# Altium PCB EE209_PCB.PcbDoc
Units mm, origin at the board's own origin, x right, y up, seen from the top; angles counter-clockwise.
Board outline 54 x 85.8 mm, 2 copper layers (Top Layer, Bottom Layer); 74 components, 41 nets, 229 pads, 29 vias.
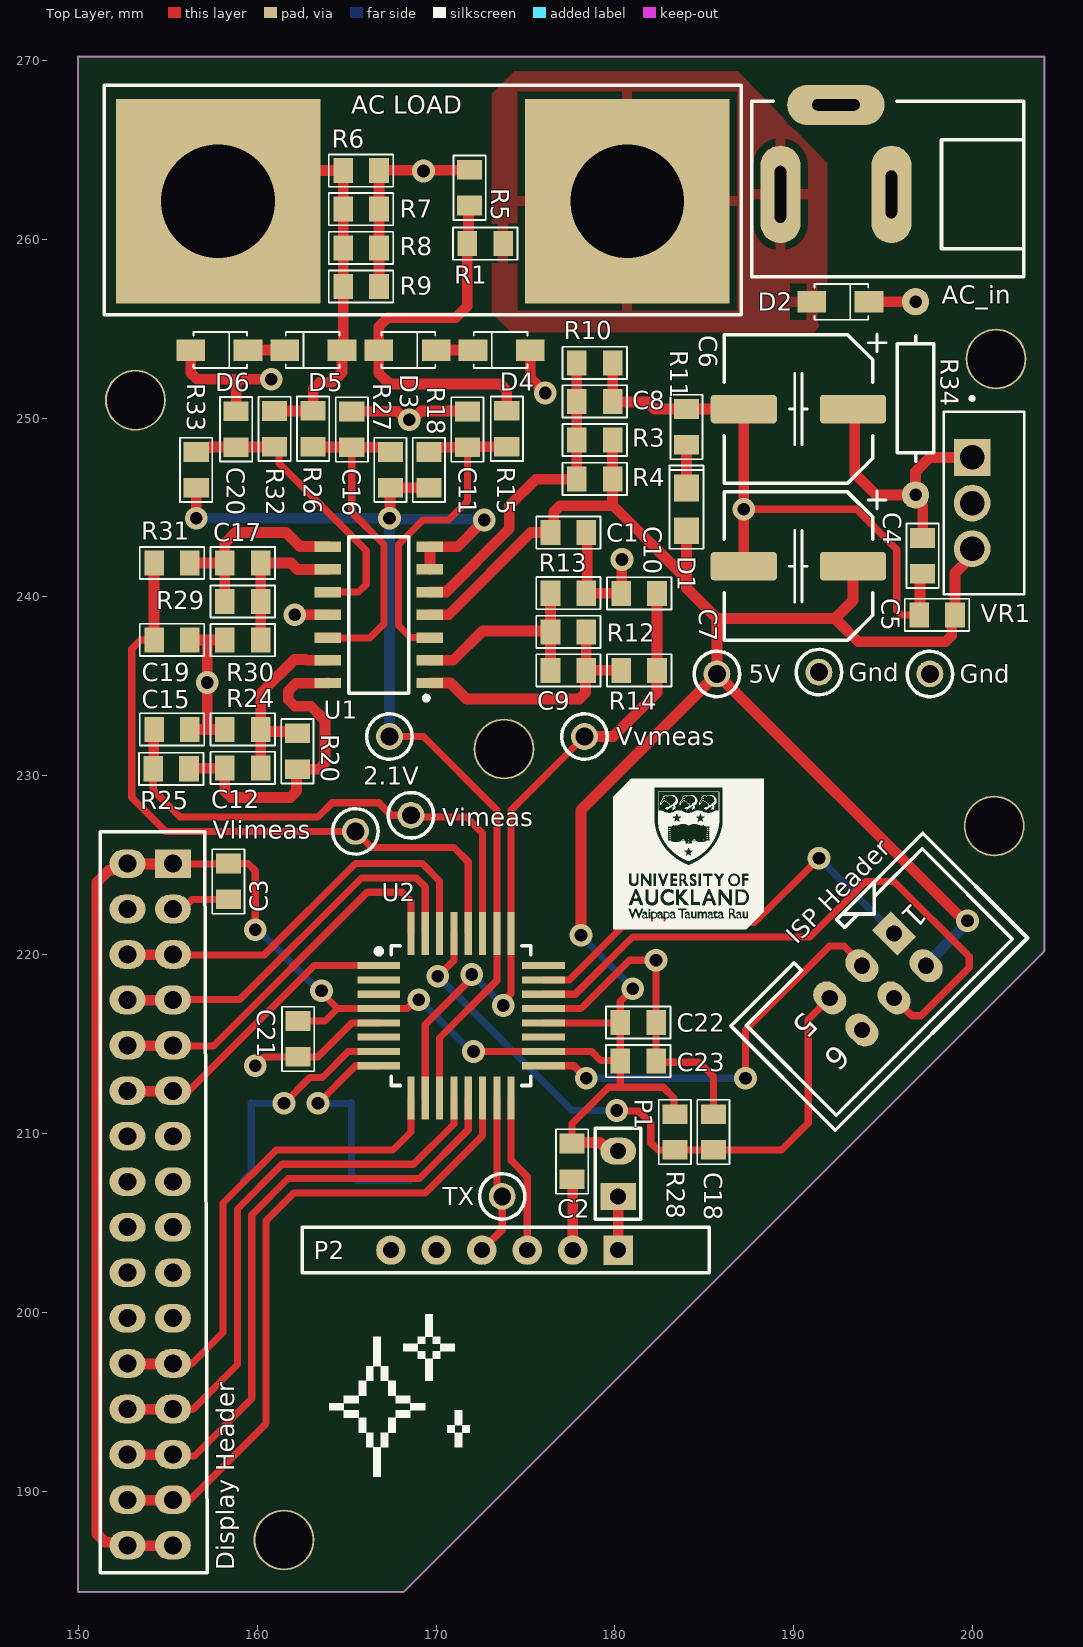
[diagram p0: Top Layer view]
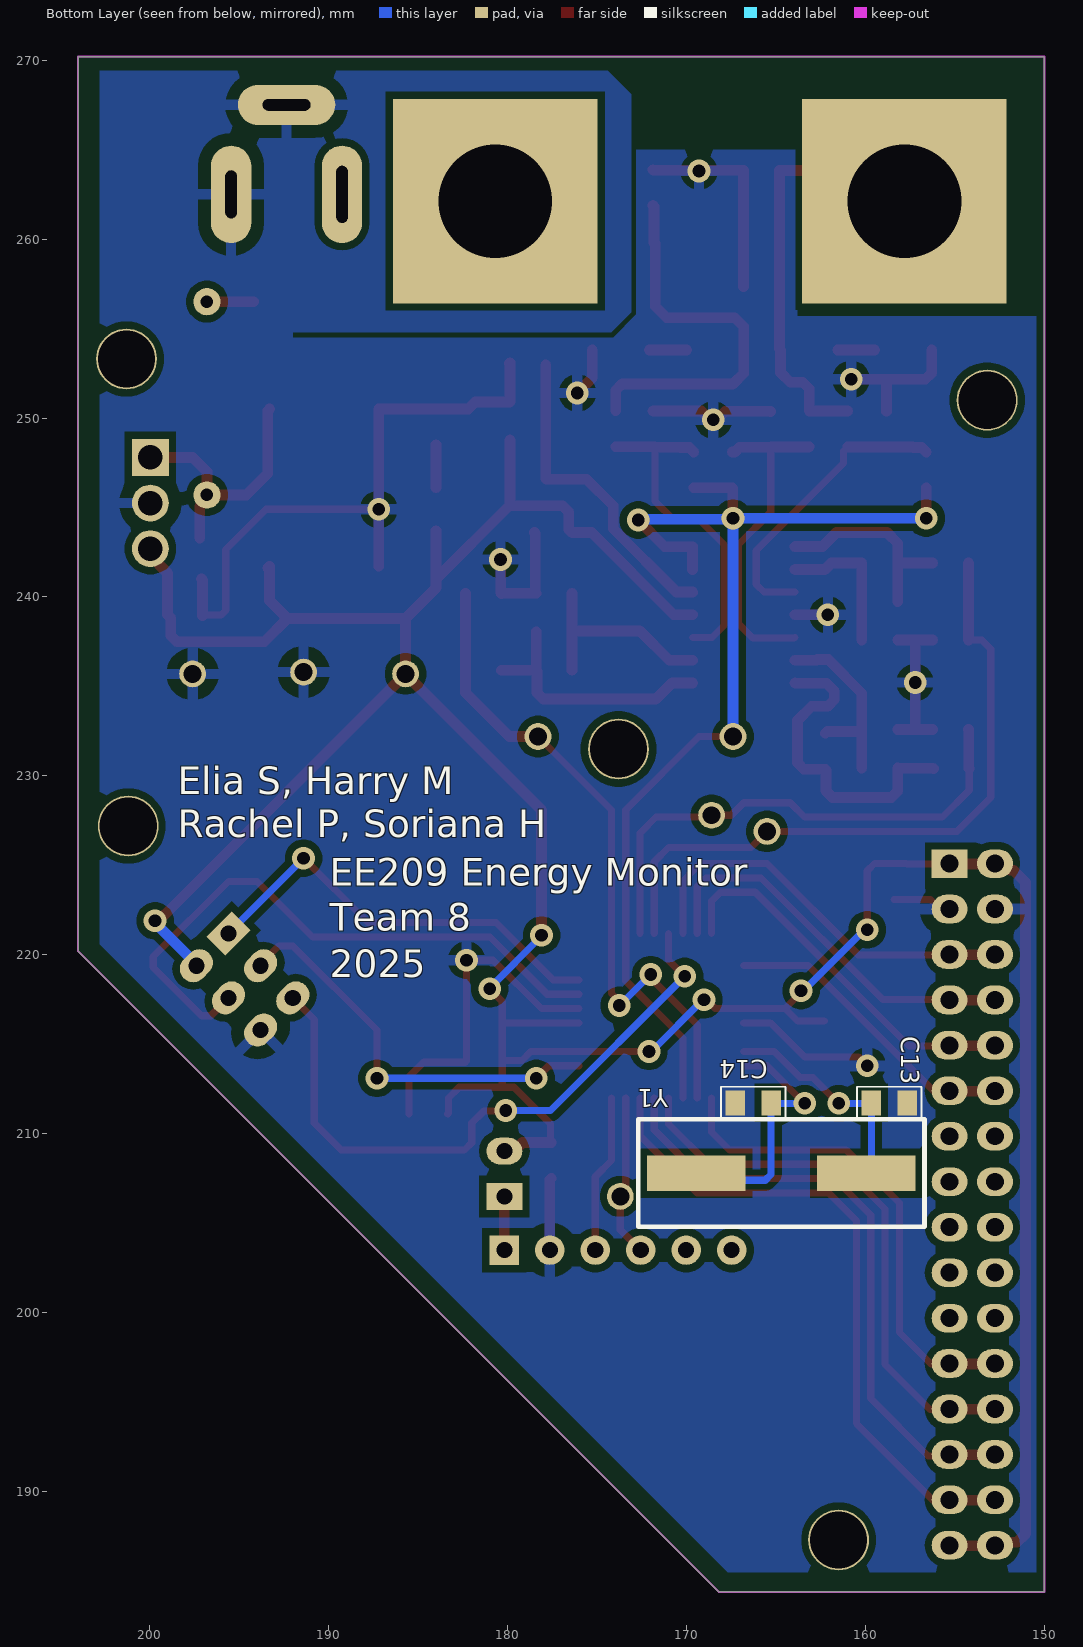
[diagram p1: Bottom Layer view, seen from below]

## Layer stack, top to bottom
Top Solder: solder mask 0.0102, Solder Resist, Dk 3.5
Top Layer: signal copper 0.0356
Dielectric 1: dielectric 0.32, FR-4, Dk 4.8
Bottom Layer: signal copper 0.0356
Bottom Solder: solder mask 0.0102, Solder Resist, Dk 3.5

## Board outline
150,184.4 150,270.2 204,270.2 204,220.2 168.2,184.4

## Design rules (kind name [scope] priority, off if disabled: settings)
Clearance [All] p1: gap=0.4 ignorepadtopadclearanceinfootprint=FALSE
Height [All] p1: minheight=0 maxheight=20 prefheight=12.7
HoleSize [All] p1: absolutevalues=TRUE maxlimit=10 minlimit=0.4 maxpercent=80.000 minpercent=20.000
MinimumSolderMaskSliver [All] p1: minsoldermaskwidth=0.1
PolygonConnect [All] p1: thpad.connectstyle=Relief thpad.reliefconductorwidth=0.6 thpad.reliefentries=4 thpad.polygonreliefangle="90 Angle" thpad.airgapwidth=0.7 smdpad.connectstyle=Direct smdpad.reliefconductorwidth=0.6 smdpad.reliefentries=4 smdpad.polygonreliefangle="90 Angle" smdpad.airgapwidth=0.4 via.connectstyle=Relief via.reliefconductorwidth=0.6 via.reliefentries=4 via.polygonreliefangle="90 Angle" via.airgapwidth=0.4
RoutingVias [All] p1: holewidth=0.711 width=1.27 viastyle="Through Hole" minholewidth=0.711 minwidth=1.27 maxholewidth=0.711 maxwidth=1.27
SilkToSilkClearance [All] p1: silktosilkclearance=0.1
SilkToSolderMaskClearance [IsPad] p1: minsilkscreentomaskgap=0.1 clearancetoexposedcopper=TRUE
SolderMaskExpansion [All] p1: expansion=0.102 istentingtop=FALSE
SupplyNets "Schematic Supply Nets_26" [InNet('+2.1')] p1: voltage=0.000
SupplyNets "Schematic Supply Nets_25" [InNet('DS3')] p2: voltage=0.000
SupplyNets "Schematic Supply Nets_24" [InNet('RX')] p3: voltage=0.000
SupplyNets "Schematic Supply Nets_23" [InNet('+5')] p4: voltage=0.000
SupplyNets "Schematic Supply Nets_22" [InNet('TX')] p5: voltage=0.000
SupplyNets "Schematic Supply Nets_21" [InNet('SCK')] p6: voltage=0.000
SupplyNets "Schematic Supply Nets_20" [InNet('Visp')] p7: voltage=0.000
SupplyNets "Schematic Supply Nets_19" [InNet('SH_DS')] p8: voltage=0.000
SupplyNets "Schematic Supply Nets_18" [InNet('GND')] p9: voltage=0.000
SupplyNets "Schematic Supply Nets_17" [InNet('MOSI')] p10: voltage=0.000
SupplyNets "Schematic Supply Nets_16" [InNet('Vvsp')] p11: voltage=0.000
SupplyNets "Schematic Supply Nets_15" [InNet('RST')] p12: voltage=0.000
SupplyNets "Schematic Supply Nets_14" [InNet('Vac')] p13: voltage=0.000
SupplyNets "Schematic Supply Nets_13" [InNet('En')] p14: voltage=0.000
SupplyNets "Schematic Supply Nets_12" [InNet('DS2')] p15: voltage=0.000
SupplyNets "Schematic Supply Nets_11" [InNet('SH_ST')] p16: voltage=0.000
SupplyNets "Schematic Supply Nets_10" [InNet('DS1')] p17: voltage=0.000
SupplyNets "Schematic Supply Nets_8" [InNet('DS4')] p18: voltage=0.000
SupplyNets "Schematic Supply Nets_7" [InNet('X1')] p19: voltage=0.000
SupplyNets "Schematic Supply Nets_5" [InNet('Vlimeas')] p20: voltage=0.000
SupplyNets "Schematic Supply Nets_4" [InNet('X2')] p21: voltage=0.000
SupplyNets "Schematic Supply Nets_3" [InNet('Vvmeas')] p22: voltage=0.000
SupplyNets "Schematic Supply Nets_2" [InNet('Vimeas')] p23: voltage=0.000
SupplyNets "Schematic Supply Nets_1" [InNet('MISO')] p24: voltage=0.000
SupplyNets "Schematic Supply Nets" [InNet('SH_CP')] p25: voltage=0.000
Width [All] p1: maxlimit=10 minlimit=0.4 preferedwidth=0.6
25 further rules are at their usual default settings.

## Components (designator, comment, footprint, x,y, rotation, side; value= is the part's Value field where it differs from the comment)
2.1V "5003" TP_TH 167.4,232.2 r0 top
5V "5003" TP_TH 185.7,235.7 r0 top
"AC LOAD" "AC Load" "Dual Banana Plug" 169.25,262.125 r180 top
AC_in "DC barrel jack" AC-Socket 195.25,262.5 r180 top value=socket
C1 "100nF" "0805 CAP" 177.4,243.6 r0 top
C2 "100nF" "0805 CAP" 177.605,208.453 r270 top
C3 "100nF" "0805 CAP" 158.4,224.1 r270 top
C4 "330nF" "0805 CAP" 197.2,242.3 r270 top
C5 "100nF" "0805 CAP" 198,239 r180 top
C6 "10uF" "CAP POL 8x5.4mm SMT" 190.25,250.5 r180 top
C7 "10uF" "CAP POL 8x5.4mm SMT" 190.25,241.72 r180 top
C8 "10nF" "0805 CAP" 178.87,250.928 r0 top
C9 "180pF" "0805 CAP" 177.4,235.9 r0 top
C10 "15nF" "0805 CAP" 181.354,240.2 r0 top
C11 "180pF" "0805 CAP" 171.754,249.36 r90 top
C12 "33pF" "0805 CAP" 159.2,230.446 r180 top
C13 "18pF" "0805 CAP" 158.671,211.731 r180 bottom
C14 "18pF" "0805 CAP" 166.273,211.731 r0 bottom
C15 "15nF" "0805 CAP" 155.246,232.599 r180 top
C16 "33pF" "0805 CAP" 165.292,249.36 r90 top
C17 "68pF" "0805 CAP" 159.2,241.9 r180 top
C18 "1.5nF" "0805 CAP" 185.5,210.1 r90 top
C19 "15nF" "0805 CAP" 155.246,237.6 r180 top
C20 "68pF" "0805 CAP" 158.83,249.375 r90 top
C21 "100nF" "0805 CAP" 162.3,215.3 r270 top
C22 "100nF" "0805 CAP" 181.301,216.218 r0 top
C23 "100nF" "0805 CAP" 181.3,214.064 r0 top
D1 "LTST-C170KGKT" "0805 LED" 183.994,244.898 r90 top
D2 "1N4148W-7-F" SOD123 192.651,256.496 r0 top
D3 "BZT52H-B4V7" SOD123 168.457,253.8 r0 top
D4 "BZT52H-B4V7" SOD123 173.614,253.8 r180 top
D5 "BZT52H-B4V7" SOD123 163.1,253.8 r180 top
D6 "BZT52H-B4V7" SOD123 157.943,253.8 r0 top
"Display Header" "Display" Display 154.03,207.32 r90 top
Gnd "5003" TP_TH 197.6,235.7 r0 top (schematic designator TP2)
Gnd "5003" TP_TH 191.4,235.8 r0 top (schematic designator TP1)
"ISP Header" "Header 3X2" ECE-BHDR2X3 195.596,221.188 r225 top (schematic designator "ISp Header")
P1 "Header 2" ece-HDR1X2 180.179,206.494 r90 top
P2 "BLE Module Header" HM10_HDR1X6 180.18,203.5 r180 top
R1 "560k" "0805 RES" 172.75,259.75 r0 top
R3 "3.3k" "0805 RES" 178.87,248.774 r0 top
R4 "5.6k" "0805 RES" 178.87,246.601 r0 top
R5 "27k" "0805 RES" 171.875,262.875 r270 top
R6 "1" "0805 RES" 165.809,263.83 r180 top
R7 "1" "0805 RES" 165.809,261.671 r180 top
R8 "1" "0805 RES" 165.809,259.512 r180 top
R9 "1" "0805 RES" 165.809,257.353 r180 top
R10 "1.5k" "0805 RES" 178.87,253.082 r180 top
R11 "220" "0805 RES" 184,249.502 r270 top
R12 "82k" "0805 RES" 177.4,238.054 r180 top
R13 "82k" "0805 RES" 177.4,240.208 r180 top
R14 "1k" "0805 RES" 181.354,235.902 r180 top
R15 "56k" "0805 RES" 173.954,249.4 r270 top
R18 "82k" "0805 RES" 169.6,247.1 r270 top
R20 "530k" "0805 RES" 162.254,231.377 r90 top
R24 "100k" "0805 RES" 159.2,232.6 r0 top
R25 "1k" "0805 RES" 155.2,230.4 r0 top
R26 "100k" "0805 RES" 163.138,249.4 r270 top
R27 "530k" "0805 RES" 167.446,247.1 r270 top
R28 "10k" "0805 RES" 183.346,210.1 r90 top
R29 "230k" "0805 RES" 159.2,239.746 r0 top
R30 "12k" "0805 RES" 159.2,237.592 r0 top
R31 "1k" "0805 RES" 155.246,241.9 r0 top
R32 "12k" "0805 RES" 160.984,249.391 r270 top
R33 "230k" "0805 RES" 156.6,247.1 r270 top
R34 "*" AXIAL-0.4 196.8,251.1 r270 top
TX "5003" TP_TH 173.7,206.5 r0 top
U1 "LM324DR2G" SOIC-14 166.8,239 r180 top
U2 "ATmega328PB MCU" "32 - TQFP" 171.4,216.6 r0 top
Vimeas "5003" TP_TH 168.6,227.8 r0 top
Vlimeas "5003" TP_TH 165.5,226.9 r0 top
VR1 "L7805" TO255P1020X450X2000-3 200.625,245.25 r270 top
Vvmeas "5003" TP_TH 178.3,232.2 r0 top
Y1 "SMT-XTAL 16MHz" HC49-US 164.7,207.8 r0 bottom

## Footprints (in the part's own frame and the unit in brackets; to place one, negate y for a bottom-side part, rotate by r counter-clockwise, add the part's x,y. Pads: shape width x height; smd on the part's side, far side on the other; paste and mask are expansions set on the pad)
"32 - TQFP" [mm]
  rect 2.4x0.4 smd: 1(-4.6,2.8) 2(-4.6,2) 3(-4.6,1.2) 4(-4.6,0.4) 5(-4.6,-0.4) 6(-4.6,-1.2) 7(-4.6,-2) 8(-4.6,-2.8) 17(4.6,-2.8) 18(4.6,-2) 19(4.6,-1.2) 20(4.6,-0.4) 21(4.6,0.4) 22(4.6,1.2) 23(4.6,2) 24(4.6,2.8)
  rect 0.4x2.4 smd: 9(-2.8,-4.6) 10(-2,-4.6) 11(-1.2,-4.6) 12(-0.4,-4.6) 13(0.4,-4.6) 14(1.2,-4.6) 15(2,-4.6) 16(2.8,-4.6) 25(2.8,4.6) 26(2,4.6) 27(1.2,4.6) 28(0.4,4.6) 29(-0.4,4.6) 30(-1.2,4.6) 31(-2,4.6) 32(-2.8,4.6)
  silkscreen extent -4.74,-3.9 3.9,3.9, body extent -4.5,-4.5 4.5,4.5, height 1.3
"0805 CAP" [mm] "http://www.digikey.co.nz/Web%20Export/Supplier%20Content/Vishay_8026/PDF/VishayBeyschlag_SolderPad.pdf?redirected=1 with dimension G modified by +0.25mm"
  rect 1.1x1.4 smd: 1(-1,0) 2(1,0)
  silkscreen extent -1.8,-0.9 1.8,0.9, body extent -1.04,-0.66 1.04,0.66, height 0.61
"0805 LED" [mm] "RED AS AlGaAs SMD LED, Body; 2mm x 1.25 mm (LxW)"
  rect 1.5x1.4 smd: 1(-1.2,0) 2(1.2,0)
  silkscreen extent -2.2,-0.95 2.45,0.95, body extent -1,-0.63 1,0.63, height 1.1
"0805 RES" [mm] "http://www.digikey.co.nz/Web%20Export/Supplier%20Content/Vishay_8026/PDF/VishayBeyschlag_SolderPad.pdf?redirected=1 with dimension G modified by +0.25mm"
  rect 1.1x1.4 smd: 1(-1,0) 2(1,0)
  silkscreen extent -1.8,-0.9 1.8,0.9, body extent -1.04,-0.66 1.04,0.66, height 0.61
AC-Socket [mm]
  oval 2.25x5.45 hole 0.635 slot 3.175 at 90 deg: 1(6,0)
  oval 5.45x2.25 hole 0.635 slot 2.667 at 0 deg: 2(2.9,-5)
  oval 2.25x5.45 hole 0.635 slot 2.667 at 90 deg: 3(-0.2,0)
  silkscreen extent -7.6,-5.2 7.6,4.6, body extent -6.7,-5 6,4.2, height 10.5
AXIAL-0.4 [mm]
  round 1.524 hole 0.7: 1(-5.4,0) 2(5.4,0)
  silkscreen extent -3.5,-1.02 3.5,1.02, body extent -5.7,-1.3 5.7,1.3, height 2.7
"CAP POL 8x5.4mm SMT" [mm]
  round 0.508 on Mech15: 0(0,0)
  rrect25% 3.7x1.6 smd: 1(-3.05,0) 2(3.05,0)
  silkscreen extent -4.9,-4.2 4.15,4.15, body extent -4.5,-4.15 4.5,4.15, height 5.4
Display [mm]
  rect 1.6x2 hole 1: 1(17.78,-1.27)
  oval 1.6x2 hole 1: 2(17.78,1.27) 3(15.24,-1.27) 4(15.24,1.27) 5(12.7,-1.27) 6(12.7,1.27) 7(10.16,-1.27) 8(10.16,1.27) 9(7.62,-1.27) 10(7.62,1.27) 11(5.08,-1.27) 12(5.08,1.27) 13(2.54,-1.27) 14(2.54,1.27) 15(0,-1.27) 16(0,1.27) 17(-2.54,-1.27) 18(-2.54,1.27) 19(-5.08,-1.27) 20(-5.08,1.27) 21(-7.62,-1.27) 22(-7.62,1.27) 23(-10.16,-1.27) 24(-10.16,1.27) 25(-12.7,-1.27) 26(-12.7,1.27) 27(-15.24,-1.27) 28(-15.24,1.27) 29(-17.78,-1.27) 30(-17.78,1.27) 31(-20.32,-1.27) 32(-20.32,1.27)
  silkscreen extent -21.84,-3.18 19.56,2.79, body extent -32.6,-50 26.4,4, height 13
"Dual Banana Plug" [mm] "Connector; 2 Position"
  rect 11.43x11.43 hole 6.35: 1(-11.43,0) 2(11.43,0)
  silkscreen extent -17.8,-6.48 17.8,6.35, body extent -17.38,-5.99 17.43,5.99, height 5.5
ECE-BHDR2X3 [mm]
  rect 1.5x2 hole 0.9: 1(0,0)
  oval 1.5x2 hole 0.9 paste-2539.97: 2(0,2.54)
  oval 1.5x2 hole 0.9: 3(2.54,0) 4(2.54,2.54) 5(5.08,0) 6(5.08,2.54)
  silkscreen extent -5.1,-2.82 10.1,5.45
ece-HDR1X2 [mm] "Header 2 way"
  rect 1.5x2 hole 0.9: 1(0,0)
  oval 1.5x2 hole 0.9: 2(2.54,0)
  silkscreen extent -1.27,-1.27 3.81,1.27
HC49-US [mm] "20Mhz Crystal"
  rect 5.5x2 smd: 1(-4.75,0) 2(4.75,0)
  silkscreen extent -8,-3 8,3, body extent -4.79,-2.4 4.79,2.4, height 3.8
HM10_HDR1X6 [mil] "Connector; Header; 6 Position"
  rect 65x65 hole 35.43: 1(0,0)
  round 65 hole 35.43: 2(100,0) 3(200,0) 4(300,0) 5(400,0) 6(500,0)
  silkscreen extent -200,-50 695,50, body extent -142,-39 571,228, height 1843
SOD123 [mm] "SOD-123; 2 Leads; Body 2.7 x 1.6 mm, (LxW)"
  rect 1.6x1.2 smd: 1(-1.65,0) 2(1.55,0)
  silkscreen extent -1.5,-1 1.5,1, body extent -1.8,-0.86 1.8,0.86, height 1.21
SOIC-14 [mm] "SOIC, 14-Leads, Body 8.75x4mm, Pitch 1.27mm"
  rect 1.48x0.58 smd: 1(-2.86,3.81) 2(-2.86,2.54) 3(-2.86,1.27) 4(-2.86,0) 5(-2.86,-1.27) 6(-2.86,-2.54) 7(-2.86,-3.81) 8(2.86,-3.81) 9(2.86,-2.54) 10(2.86,-1.27) 11(2.86,0) 12(2.86,1.27) 13(2.86,2.54) 14(2.86,3.81)
  silkscreen extent -2.79,-4.38 1.67,4.77, body extent -3.1,-4.38 3.1,4.37, height 1.75
TO255P1020X450X2000-3 [mm]
  rect 2.055x2.055 / inner round 2.055 / far side rect 2.055x2.055 hole 1.37: 1(-2.55,-0.663)
  round 2.055 hole 1.37: 2(0,-0.663) 3(2.55,-0.663)
  silkscreen extent -5.95,-2.25 5.1,2.25, body extent -5.1,-2.25 5.1,2.25, height 20
TP_TH [mm] "Test Point, Through Hole, Dia 2.54mm"
  round 1.5 hole 1: 1(0,0)
  silkscreen extent -1.27,-1.27 1.27,1.27, body extent -1.27,-1.27 1.27,1.27, height 4.57

## Part data
2.1V 5V Gnd Gnd TX Vimeas Vlimeas Vvmeas: library part TestPoint, "Test Point, Orange, 1-Pin THD, RoHS", Forward Current="3 A", Forward Voltage="1.08 V", Max Operating Temperature="150 degC", Max Surge Current="80 A", Min Operating Temperature="-65 degC", Package Quantity=500, Peak Reverse Current="600 uA", ComponentLink1Description="Manufacturer URL", ComponentLink1URL=http://www.keyelco.com/, ComponentLink2Description=Datasheet, ComponentLink2URL=http://keyelco.com/userAssets/file/M65p56.pdf, DatasheetVersion=Jun-15, Diameter="5.3 mm", Height="0.25 inch", Length="9.5 mm", Mount="Through Hole", PackageDescription="1-Pin Through Hole Device, Dia 2.54 mm", PackageReference=5003, Packaging=Bulk, Pins=2, Radiation Hardening=No, REACH SVHC="No SVHC", RoHSCompliant=true, Weight="0.01 lb", Width="0.25 inch"
"AC LOAD": library part AC_Output, "Dual banana plugs connection to the AC load", LatestRevisionDate=17-Jul-2002, LatestRevisionNote="Re-released for DXP Platform.", Publisher="Altium Limited"
AC_in: library part AC_Input, "DC barrel jack connection to AC source"
C1 C2 C3 C4 C5 C8 C9 C10 C11 C12 C13 C14 C15 C16 C17 C18 C19 C20 C21 C22 C23: library part CerCap_SMT_0805, "SMT ceramic capacitor 0805 size"
C6 C7: library part ElecCap_SMT_8D0, "CAP ALUM 22UF 20% 50V SMD (Model: UWX1H220MCL1GB)", Capacitance 1="22 µF", ESR (Equivalent Series Resistance)=-, Lifetime @ Temp.="2000 Hrs @ 85°C", Manufacturer=Nichicon, Manufacturer Part Number=UWX1V220MCL1GB, Operating Temperature="-40°C ~ 85°C", Package / Case="Radial, Can - SMD", Supplier Part Number 1=493-2136-1-ND, Tolerance=±20%, Applications="General Purpose", Category=Capacitors, ComponentLink1Description=http://nichicon-us.com/english/products/pdfs/e-uwx.pdf, ComponentLink1URL=http://nichicon-us.com/english/products/pdfs/e-uwx.pdf, Height - Seated (Max)="0.213\" (5.40mm)", Lead Spacing=-, Mounting Type="Surface Mount", Packaging="Cut Tape (CT)", Part Status=Active, Polarization=Polar, Pricing 1="1=0.59, 10=0.406, 100=0.2304, 500=0.16268 (NZD)", Ratings=-, Revision="July-2002: Re-released for DXP Platform.", RoHS="RoHS Compliant", Size / Dimension="0.248\" Dia (6.30mm)", Stock 1=680, Supplier 1=Digi-Key, Surface Mount Land Size="0.260\" L x 0.260\" W (6.60mm x 6.60mm)"
D1: library part LED_SMT_0805, "SMT LED 0805 size", Color=Green, Current - Test=20mA, Lens Color=Colorless, Manufacturer="Lite-On Inc.", Millicandela Rating=35mcd, Package / Case="0805 (2012 Metric)", Supplier Part Number 1=160-1414-1-ND, Voltage - Forward (Vf) (Typ)=2V, Category=Optoelectronics, ComponentLink1Description=http://optoelectronics.liteon.com/upload/download/DS22-2000-073/LTST-C170KGKT.pdf, ComponentLink1URL=http://optoelectronics.liteon.com/upload/download/DS22-2000-073/LTST-C170KGKT.pdf, Features=-, Height (Max)=1.10mm, Lens Style/Size="Rectangle with Flat Top, 1.40mm x 1.25mm", Lens Transparency=Clear, Manufacturer Part Number=LTST-C170KGKT, Mounting Type="Surface Mount", Packaging="Cut Tape (CT)", Part Status=Active, Pricing 1="1=0.62, 10=0.459, 25=0.338, 100=0.2415, 250=0.16416, 500=0.14486, 1000=0.11347 (NZD)", RoHS="RoHS Compliant", Size / Dimension="2.00mm L x 1.25mm W", Stock 1=503069, Supplier 1=Digi-Key, Viewing Angle=130°, Wavelength - Dominant=571nm, Wavelength - Peak=574nm
D2: library part 1N4148_SMT_SOD123, "DIODE GEN PURP 100V 300MA SOD123", Base Part Number=1N4148W, Capacitance @ Vr, F="2pF @ 0V, 1MHz", Current - Average Rectified (Io)=150mA, Manufacturer="Diodes Incorporated", Manufacturer Part Number=1N4148W-13-F, Operating Temperature - Junction="-65°C ~ 150°C", Package / Case=SOD-123, Supplier Part Number 1=1N4148W-13FDICT-ND, Category="Discrete Semiconductor Products", ComponentLink1Description=https://www.diodes.com/assets/Datasheets/ds30086.pdf, ComponentLink1URL=https://www.diodes.com/assets/Datasheets/ds30086.pdf, Diode Type=Standard, Mounting Type="Surface Mount", Packaging="Cut Tape (CT)", Part Status=Active, Pricing 1="1=0.33, 10=0.292, 100=0.1586, 500=0.0976, 1000=0.06656 (NZD)", RoHS="RoHS Compliant", Speed="Small Signal =< 200mA (Io), Any Speed", Stock 1=5282, Supplier 1=Digi-Key, Supplier Device Package=SOD-123
D3 D4 D5 D6: library part Zener_SMT_SOD123, "SMT zener diode with SOD123 package", Manufacturer="Nexperia USA Inc.", Manufacturer Part Number=BZT52H-B4V7,115, Operating Temperature="-65°C ~ 150°C (TA)", Package / Case=SOD-123F, Supplier Part Number 1=1727-1611-1-ND, Tolerance=±2%, Category="Discrete Semiconductor Products", ComponentLink1Description=https://assets.nexperia.com/documents/data-sheet/BZT52H_SER.pdf, ComponentLink1URL=https://assets.nexperia.com/documents/data-sheet/BZT52H_SER.pdf, Mounting Type="Surface Mount", Packaging="Cut Tape (CT)", Part Status=Active, Pricing 1="1=0.51, 10=0.408, 100=0.2164, 500=0.14232, 1000=0.09678 (NZD)", RoHS="RoHS Compliant", Stock 1=0, Supplier 1=Digi-Key, Supplier Device Package=SOD-123F
"Display Header": "16-Pin Header Connecting Display"
P1: "Header, 2-Pin", LatestRevisionDate=17-Jul-2002, LatestRevisionNote="Re-released for DXP Platform.", Publisher="Altium Limited"
P2: library part BLEModule_TH, "2.54mm pitch 6-pin header for BLE module", LatestRevisionDate=17-Jul-2002, LatestRevisionNote="Re-released for DXP Platform.", Publisher="Altium Limited"
R1 R3 R4 R5 R6 R7 R8 R9 R10 R11 R12 R13 R14 R15 R18 R20 R24 R25 R26 R27 R28 R29 R30 R31 R32 R33: library part Res_SMT_0805, "0805 resistor", ComponentLink1Description=https://nz.mouser.com/datasheet/2/315/AOA0000C304-1149620.pdf, LatestRevisionDate=17-Jul-2002, LatestRevisionNote="Re-released for DXP Platform.", PackageReference=AXIAL-0.4, Published=8-Jun-2000, Publisher="Altium Limited"
R34: library part Res_TH_0AX4, "Through hole resistor", ComponentLink1Description=http://www.royalohm.com/pdf/product2017/PrecisionMetalMF.pdf, LatestRevisionDate=17-Jul-2002, LatestRevisionNote="Re-released for DXP Platform.", PackageReference=AXIAL-0.4, Published=8-Jun-2000, Publisher="Altium Limited"
U1: library part LM324DR_SMT_SOIC16, "Single Supply Quad Operational Amplifier, 3 to 32 V, 0 to 70 degC, 14-Pin SOIC, Pb-Free, Tape and Reel", Manufacturer="On Semiconductor", ComponentLink1Description="Manufacturer URL", ComponentLink1URL=http://www.onsemi.com/, ComponentLink2Description=Datasheet, ComponentLink2URL=http://www.onsemi.cn/pub_link/Collateral/LM324-D.PDF, ComponentLink3Description="Package Specification", ComponentLink3URL=http://www.onsemi.com/pub_link/Collateral/751A-03.PDF, DatasheetVersion="Rev. 25", Mounting Technology="Surface Mount", PackageDescription="14-Pin Small Outline Integrated Circuit, Body 8.65 x 3.9 mm, Pitch 1.27 mm", PackageReference=SOIC-14-751A-03, PackageVersion="Rev. K, 05/2011", Packing="Tape and Reel", PartNumber=LM324DR2G, RoHS=TRUE, VCC Max (V)=32, VCC Min (V)=3
U2: library part ATmega328PB_SMT_TQFP32, "IC MCU 8BIT 32KB FLASH 32TQFP", Manufacturer=Atmel, Manufacturer Part Number=ATMEGA328PB-AN, Operating Temperature="-40°C ~ 105°C (TA)", Package / Case=32-TQFP, Supplier Device Package="32-TQFP (7x7)", Supplier Part Number 1=ATMEGA328PB-AN-ND, Voltage - Supply (Vcc/Vdd)="1.8 V ~ 5.5 V", Category="Integrated Circuits (ICs)", ComponentLink1Description=http://www.atmel.com/images/atmel-42397-8-bit-avr-microcontroller-atmega328pb_datasheet.pdf, ComponentLink1URL=http://www.atmel.com/images/atmel-42397-8-bit-avr-microcontroller-atmega328pb_datasheet.pdf, Connectivity="I²C, SPI, UART/USART", Core Processor=AVR, Core Size=8-Bit, Data Converters="A/D 8x10b", EEPROM Size="1K x 8", Number of I/O=27, Oscillator Type=Internal, Packaging=Tray, Part Status=Active, Peripherals="Brown-out Detect/Reset, POR, PWM, WDT", Pricing 1="1=2.74, 10=2.448, 25=2.2032, 100=2.0074, 250=1.81152, 500=1.62548, 1000=1.37088 (USD)", Program Memory Size="32KB (16K x 16)", Program Memory Type=FLASH, RAM Size="2K x 8", RoHS="RoHS Compliant", Speed=20MHz, Stock 1=366, Supplier 1=Digi-Key
VR1: "Standard Regulator Pos 5V 1.5A 3-Pin(3+Tab) TO-220FP Tube", Package=None, Availability="Not in stock", Check_prices=https://www.snapeda.com/parts/L7805/STMicroelectronics/view-part/?ref=eda, MF=STMicroelectronics, MP=L7805, Price=None, SnapEDA_Link=https://www.snapeda.com/parts/L7805/STMicroelectronics/view-part/?ref=snap
Y1: library part TXC9C-16_XTAL_SMT, "9C-16.000MAAJ-T crystal 16.0000MHZ 18PF SMD", Frequency Stability=±30ppm, Load Capacitance=18pF, Manufacturer="TXC CORPORATION", Manufacturer Part Number=9C-16.000MAAJ-T, Operating Mode=Fundamental, Operating Temperature="-20°C ~ 70°C", Package / Case=HC-49/US, Ratings=-, Supplier Part Number 1=887-1059-1-ND, Category="Crystals, Oscillators, Resonators", ComponentLink1Description=http://www.txccorp.com/download/products/quartz_crystals/2015TXC_9C_32.pdf, ComponentLink1URL=http://www.txccorp.com/download/products/quartz_crystals/2015TXC_9C_32.pdf, Frequency Tolerance=±30ppm, Height - Seated (Max)="0.161\" (4.10mm)", Mounting Type="Surface Mount", Packaging="Cut Tape (CT)", Part Status=Active, Pricing 1="1=0.75, 10=0.628, 50=0.5656, 100=0.5026, 500=0.47744 (NZD)", RoHS="RoHS Compliant", Size / Dimension="0.449\" L x 0.189\" W (11.40mm x 4.80mm)", Stock 1=11514, Supplier 1=Digi-Key, Type="MHz Crystal"

## Free pads (board coordinates)
  round 3.4 hole 3.2 unplated: 3(153.2,251) 4(201.3,253.3) 5(173.8,231.5) 6(201.2,227.2) 8(161.5,187.3)

## Via types
v1: diameter 1.27, hole 0.711, Top Layer to Bottom Layer, 29 vias

## Nets (pads, with @x,y where several pads share a name; then routed paths per layer and width w, separated by ;. In a path a pad name is that pad's centre, name@x,y a point inside that pad or via, vN(x,y) a via of type N, cw(c..) or ccw(c..) an arc to the next point about the centre after c; other vN are vias at no path point)
+2.1: 2.1V.1 R18.2 R27.2 R33.2 U1.6 U1.7 U2.11 U2.26 | length 63.6
  Top Layer w0.4: 2.1V.1 169.3,232.2 173.4,228.1 U2.26 173.4,218.553 170.2,215.353 U2.11
  Top Layer w0.6: v1(156.6,244.4) R33.2 ; v1(167.4,244.4) 167.423,244.423 167.423,246.077 R27.2 R18.2 ; U1.6 U1.7 171.21,242.81 172.699,244.299 v1(172.699,244.301)
  Bottom Layer w0.6: v1(156.6,244.4) v1(167.4,244.4) ; 2.1V.1@167.4,232.528 v1(167.4,244.4) ; v1(172.699,244.301) 172.65,244.35 167.45,244.35 v1(167.4,244.4)
+5: 5V.1 "Display Header.1" "Display Header.2" "Display Header.31" "Display Header.32" "ISP Header.2" C1.1 C2.1 C3.1 C5.1 C7.1 C21.1 C22.1 C23.1 D1.1 P1.2 R3.2 R4.2 R28.2 U1.4 U2.4 U2.18 U2.20 VR1.3 | length 201.3
  Top Layer w0.4: 155.3,225.08 157.68,225.08 ; 157.7,225.1 C3.1 159.5,225.1 159.9,224.7 v1(159.9,221.4) ; C21.1 163.8,216.3 164.5,217 ; v1(163.6,218) 163.6,217.9 164.5,217 ; v1(169.029,217.486) 168.878,217.486 168.392,217 U2.4 164.5,217 ; v1(172.1,214.6) 172.94,214.6 U2.18 178.7,214.6 179.2,214.1 180.264,214.1 C23.1 ; U2.20 180.283,216.2 C22.1 ; C2.1 177.605,210.559 179.647,212.6 180.3,212.6 ; v1(181,218.1) 180.301,217.401 C22.1 ; R28.2 183.3,211.146 183.3,212 182.7,212.6 180.3,212.6 ; 180.3,212.6 C23.1 ; C23.1 C22.1
  Top Layer w0.6: 152.76,186.98 155.3,186.98 ; 152.76,187 152.588,187.172 151.528,187.172 151.06,187.64 151.06,224.06 151.728,224.728 151.917,224.728 152.289,225.1 152.76,225.1 ; 152.76,225.08 155.3,225.08 ; U1.4 169.67,239.01 170.71,239.01 175.3,243.6 C1.1 176.574,243.774 176.574,244.749 176.926,245.1 179.9,245.1 ; C2.1@177.563,209.515 179.163,209.515 179.644,209.034 P1.2@180.137,209.034 ; v1(178.1,221.1) 178.1,228.1 5V.1 ; R3.2 R4.2 179.87,245.13 179.9,245.1 ; D1.1 183.994,241.006 ; C7.1@193.4,241.62 C7.1 193.3,239.8 192.3,238.8 ; VR1.3@199.675,242.7 VR1.3 199.962,242.306 199,241.344 C5.1 198.826,238.826 198.826,237.851 198.474,237.5 193.6,237.5 192.3,238.8 ; v1(199.7,221.9) 199.519,221.9 199.184,222.235 199.165,222.235 5V.1 ; 179.9,245.1 183.994,241.006 ; 183.994,241.006 183.994,240.506 185.7,238.8 ; 5V.1 185.7,238.8 ; 185.7,238.8 192.3,238.8
  Bottom Layer w0.4: v1(159.9,221.4) 160.05,221.4 163.45,218 v1(163.6,218) ; v1(169.029,217.486) 169.071,217.486 171.957,214.6 v1(172.1,214.6) ; v1(178.1,221.1) 178.1,221.05 181,218.15 v1(181,218.1)
  Bottom Layer w0.6: 197.392,219.392 197.392,219.492 199.7,221.8 v1(199.7,221.9)
DS1: "Display Header.5" "Display Header.6" U2.30 | length 22.9
  Top Layer w0.4: 155.3,220 160.4,220 165.5,225.1 169.231,225.1 170.2,224.131 U2.30
  Top Layer w0.6: 152.76,220 155.3,220
DS2: "Display Header.7" "Display Header.8" U2.31 | length 22.3
  Top Layer w0.4: 155.3,217.46 155.34,217.5 159.031,217.5 165.831,224.3 168.9,224.3 169.4,223.8 U2.31
  Top Layer w0.6: 152.76,217.46 155.3,217.46
DS3: "Display Header.9" "Display Header.10" U2.32 | length 21.4
  Top Layer w0.4: 155.3,214.92 155.32,214.9 157.563,214.9 166.163,223.5 168.1,223.5 168.6,223 U2.32
  Top Layer w0.6: 152.76,214.92 155.3,214.92
DS4: "Display Header.11" "Display Header.12" U2.1 | length 16.9
  Top Layer w0.4: 155.3,212.38 155.32,212.4 156.2,212.4 163.2,219.4 U2.1
  Top Layer w0.6: 152.76,212.38 155.3,212.38
En: "Display Header.27" "Display Header.28" U2.13 | length 34.4
  Top Layer w0.4: 155.3,192.06 155.36,192 156.5,192 159.7,195.2 159.7,205.469 161.731,207.5 169.08,207.5 171.8,210.22 U2.13
  Top Layer w0.6: 152.76,192.06 155.3,192.06
GND: "Display Header.3" "Display Header.4" "ISP Header.6" AC_in.2 AC_in.3 C1.2 C2.2 C3.2 C4.2 C5.2 C6.2 C7.2 C8.2 C10.1 C11.2 C13.2 C14.2 C15.1 C16.2 C18.2 C19.1 C20.2 C21.2 C22.2 C23.2 D4.1 D6.1 Gnd.1 P2.2 R5.1 R6.1 R7.1 R8.1 R9.1 R10.1 R11.1 R13.1 R24.1 R30.1 U1.11 U2.5 U2.21 VR1.2 | length 115.8
  Top Layer w0.4: 155.3,222.56 155.825,222.56 156.365,223.1 C3.2 ; v1(159.9,213.8) 160.4,214.3 C21.2 163.4,214.3 165.3,216.2 U2.5 ; U2.21 178.111,217 180.811,219.7 v1(182.3,219.7) ; C23.2 182.364,214 184.7,214 185.5,213.2 C18.2 ; C23.2 C22.2 v1(182.3,219.7) ; v1(187.2,244.9) 193.501,244.9 195.75,242.651 195.75,239.25 196,239 C5.2
  Top Layer w0.6: C19.1 156.25,237.596 157.223,237.596 ; C15.1@156.246,232.6 157.223,232.6 ; D6.1 156.3,253.793 156.3,252.516 156.651,252.165 158.726,252.165 ; R24.1 157.223,232.6 ; R30.1 158.196,237.596 157.223,237.596 ; C20.2 158.83,252.061 158.726,252.165 ; v1(160.8,252.165) 158.726,252.165 ; v1(162.1,239) U1.11 ; C16.2 165.311,250.38 167.839,250.38 168.319,249.9 v1(168.5,249.9) 168.681,249.9 169.18,250.399 C11.2@171.874,250.399 ; R9.1 R8.1 R7.1 R6.1 166.832,263.852 171.852,263.852 R5.1 ; D4.1 175.264,252.236 v1(176.1,251.4) ; C2.2@177.563,207.515 177.64,207.439 P2.2 ; C1.2@178.5,243.6 178.45,243.55 178.45,240.25 178.404,240.204 180.342,240.204 C10.1@180.35,240.196 ; R10.1@179.87,252.957 C8.2 179.898,250.9 181.8,250.9 182.198,250.502 R11.1 ; R10.1 R10.1@179.894,253.059 ; C10.1 180.377,240.223 180.377,242.077 v1(180.4,242.1) ; R11.1@184.001,250.501 C6.2@187.199,250.501 ; C7.2 v1(187.2,244.9) C6.2 ; C5.2@197.05,238.95 197.05,240.95 C4.2@197.1,241 ; 157.223,232.6 v1(157.223,235.223) 157.223,237.596
  other v1: 169.3,263.8
MISO: "ISP Header.1" U2.23 | length 24.2
  Top Layer w0.4: U2.23 177.449,218.6 180.65,221.802 187.802,221.802 v1(191.4,225.4)
  Bottom Layer w0.4: v1(191.4,225.4) 195.596,221.204 195.596,221.188
MOSI: "ISP Header.4" U2.22 | length 34.5
  Top Layer w0.4: U2.22 177.78,217.8 180.982,221.002 190.902,221.002 194,224.1 195.6,224.1 199.8,219.9 199.8,219.3 197.1,216.6 196.592,216.6 195.596,217.596
NetC4_1: C4.1 C6.1 R34.2 VR1.1 | length 15
  Top Layer w0.6: C6.1 193.4,250.4 193.4,246.9 194.6,245.7 R34.2 ; C4.1 197.2,245.05 196.8,245.45 R34.2 ; VR1.1@199.912,247.75 VR1.1 197.6,247.8 196.8,247 R34.2
NetC8_1: C8.1 R3.1 R4.1 R10.2 U1.5 | length 17.9
  Top Layer w0.6: U1.5 169.67,240.28 170.566,240.28 174.1,243.814 174.1,245.1 175.571,246.571 R4.1@177.84,246.571 ; R4.1 R3.1 C8.1 R10.2@177.87,252.958
NetC9_1: C9.1 R12.2 R13.2 U1.2 | length 11.7
  Top Layer w0.6: U1.2 170.96,236.46 172.6,238.1 176.354,238.1 R12.2 ; C9.1 R12.2 ; R13.2 R12.2
NetC9_2: C9.2 R12.1 R14.2 U1.1 | length 14.6
  Top Layer w0.6: U1.1 170.81,235.19 171.7,234.3 178,234.3 178.351,234.651 178.351,235.851 C9.2 ; R12.1 C9.2 ; R14.2 180.353,235.901 178.401,235.901 C9.2
NetC11_1: C11.1 R15.2 R18.1 U1.3 | length 18.9
  Top Layer w0.4: U1.3 168.57,237.73 167.9,238.4 167.9,242.929 169.271,244.3 170.7,244.3 171.754,245.354 C11.1@171.754,248.403
  Top Layer w0.6: R18.1 169.85,248.35 170.341,248.35 170.351,248.36 C11.1 ; C11.1@171.794,248.4 R15.2
NetC12_1: C12.1 R20.2 R24.2 U1.13 | length 10.9
  Top Layer w0.6: C12.1 R24.2 ; R20.2 162.142,232.488 160.312,232.488 R24.2 ; U1.13 163.93,236.47 162.73,236.47 162.7,236.5 162.086,236.5 160.2,234.614 R24.2
NetC12_2: C12.2 R20.1 R25.2 U1.14 | length 18.3
  Top Layer w0.6: R25.2 156.223,230.423 158.177,230.423 C12.2 158.2,229.151 158.551,228.8 161.849,228.8 162.2,229.151 162.2,230.323 R20.1 163.449,230.377 163.8,230.728 163.8,233.1 163,233.9 162.1,233.9 161.749,234.251 161.749,234.749 162.18,235.18 163.93,235.18 U1.14
NetC16_1: C16.1 R26.2 R27.1 U1.12 | length 18.5
  Top Layer w0.4: U1.12 163.97,237.7 166.3,237.7 167.1,238.5 167.1,242.931 165.292,244.739 C16.1
  Top Layer w0.6: R26.2 163.158,248.38 165.272,248.38 C16.1 167.036,248.36 167.296,248.1 R27.1
NetC17_1: C17.1 R29.2 R30.2 U1.9 | length 8.2
  Top Layer w0.6: R30.2 R29.2 C17.1 161.9,241.9 162.26,241.54 U1.9
NetC17_2: C17.2 R29.1 R31.2 U1.8 | length 11.5
  Top Layer w0.6: R31.2 C17.2 ; R29.1 C17.2 ; U1.8 163.93,242.82 162.394,242.82 161.614,243.6 158.8,243.6 158.2,243 C17.2
NetC20_1: C20.1 R32.2 R33.1 U1.10 | length 16.6
  Top Layer w0.4: R32.2 161.224,248.151 161.224,247.476 166.1,242.6 166.1,240.7 165.67,240.27 U1.10
  Top Layer w0.6: R33.1 156.85,248.35 157.327,248.35 157.351,248.375 C20.1 ; C20.1@158.838,248.383 160.976,248.383 R32.2
NetD1_2: D1.2 R11.2 | length 2.4
  Top Layer w0.6: D1.2 183.997,246.1 183.997,248.499 R11.2
NetD2_2: D2.2 R34.1 | length 2.6
  Top Layer w0.6: D2.2 194.203,256.498 196.798,256.498 R34.1
NetD3_2: D3.2 D4.2 | length 2.1
  Top Layer w0.6: D3.2 D4.2
NetD5_2: D5.2 D6.2 | length 2.1
  Top Layer w0.6: D6.2 D5.2
NetP1_1: P1.1 P2.1 | length 3
  Top Layer w0.6: P1.1@180.137,206.494 180.18,206.451 P2.1
RST: "ISP Header.5" C18.1 R28.1 U2.29 | length 36.3
  Top Layer w0.4: v1(170.1,218.8) 171,219.7 U2.29 ; v1(180.097,211.303) 180.135,211.265 181.335,211.265 182,210.6 182,209.5 182.4,209.1 R28.1 C18.1 189.3,209.1 190.8,210.6 190.8,216.392 192.004,217.596
  Bottom Layer w0.4: v1(170.1,218.8) 177.6,211.3 180.093,211.3 v1(180.097,211.303)
RX: P2.3 U2.16 | length 8.9
  Top Layer w0.4: U2.16 174.2,208.5 175.1,207.6 P2.3
SCK: "ISP Header.3" U2.17 | length 23.3
  Top Layer w0.4: U2.17 177.7,213.8 v1(178.4,213.1) ; v1(187.3,213.1) 187.3,215.8 192,220.5 192.8,220.5 193.8,219.5 193.8,219.392
  Bottom Layer w0.4: v1(178.4,213.1) v1(187.3,213.1)
SH_CP: "Display Header.23" "Display Header.24" U2.9 | length 27.3
  Top Layer w0.4: 155.3,197.14 156.34,197.14 158.1,198.9 158.1,206.131 161.069,209.1 167.6,209.1 168.6,210.1 U2.9
  Top Layer w0.6: 152.76,197.14 155.3,197.14
SH_DS: "Display Header.29" "Display Header.30" U2.14 | length 37
  Top Layer w0.4: 155.3,189.52 156.22,189.52 160.5,193.8 160.5,205.137 162.063,206.7 169.411,206.7 172.6,209.889 U2.14
  Top Layer w0.6: 152.76,189.52 155.3,189.52
SH_ST: "Display Header.25" "Display Header.26" U2.12 | length 31.4
  Top Layer w0.4: 155.3,194.6 156.4,194.6 158.9,197.1 158.9,205.8 161.4,208.3 168.749,208.3 171,210.551 U2.12
  Top Layer w0.6: 152.76,194.6 155.3,194.6
TX: P2.4 TX.1 U2.15 | length 9.1
  Top Layer w0.4: P2.4 173.7,204.64 TX.1 173.7,206.798 173.4,207.098 U2.15
Vac: "AC LOAD.1" AC_in.1 D2.1 R1.2
Vimeas: C15.2 R25.1 U2.27 Vimeas.1 | length 29.1
  Top Layer w0.4: R25.1 154.2,229.2 155.7,227.7 163.4,227.7 164.2,228.5 166.8,228.5 167.495,227.805 168.595,227.805 168.7,227.7 171.7,227.7 172.6,226.8 U2.27
  Top Layer w0.6: R25.1 154.223,230.423 154.223,232.576 C15.2
Visp: "AC LOAD.2" D5.1 R6.2 R7.2 R8.2 R9.2 R26.1 R32.1 | length 24.4
  Top Layer w0.6: 157.82,262.125 159.525,263.83 R6.2 R7.2 R8.2 R9.2 164.809,253.859 D5.1 164.75,252.55 164.2,252 163.5,252 163.138,251.638 R26.1 163.134,250.396 160.988,250.396 R32.1
Vlimeas: C19.2 R31.1 U2.28 Vlimeas.1 | length 38.3
  Top Layer w0.4: C19.2 153.5,237.6 153,237.1 153,228.8 154.9,226.9 Vlimeas.1 166.4,226 171,226 171.8,225.2 U2.28
  Top Layer w0.6: C19.2 R31.1
Vvmeas: C10.2 R14.1 U2.10 U2.25 Vvmeas.1 | length 38
  Top Layer w0.4: U2.10 169.4,216.11 172,218.71 v1(172,218.9) ; v1(173.765,217.172) 173.765,217.407 174.2,217.842 U2.25 174.2,228.1 Vvmeas.1
  Top Layer w0.6: Vvmeas.1 179.9,232.2 182.354,234.654 R14.1 ; R14.1 C10.2
  Bottom Layer w0.4: v1(172,218.9) 172.018,218.9 173.747,217.172 v1(173.765,217.172)
Vvsp: D3.1 R1.1 R5.2 R15.1 | length 22.4
  Top Layer w0.6: D3.1@166.8,253.807 166.8,255.1 167.3,255.6 171.1,255.6 171.75,256.25 R1.1 171.812,259.813 171.812,261.813 R5.2 ; D3.1 166.8,253.793 166.8,252.5 167.4,251.9 173.6,251.9 173.954,251.546 R15.1
X1: C13.1 U2.7 Y1.1 | length 12.9
  Top Layer w0.4: v1(161.5,211.7) 162.95,213.15 163.65,213.15 165.1,214.6 U2.7
  Bottom Layer w0.4: Y1.1@159.25,207.4 Y1.1@159.871,208.021 ; Y1.1@159.671,208.021 C13.1 159.702,211.7 v1(161.5,211.7)
X2: C14.1 U2.8 Y1.2 | length 13.6
  Top Layer w0.4: v1(163.4,211.7) 165.5,213.8 U2.8
  Bottom Layer w0.4: v1(163.4,211.7) 165.242,211.7 C14.1 165.273,207.727 165.6,207.4 Y1.2@168.55,207.4
pads on no net: "Display Header.13" "Display Header.14" "Display Header.15" "Display Header.16" "Display Header.17" "Display Header.18" "Display Header.19" "Display Header.20" "Display Header.21" "Display Header.22" C6.0 C7.0 P2.5 P2.6 U2.2 U2.3 U2.6 U2.19 U2.24

## Polygon pours and split planes (outlines as drawn)
Vac on Top Layer "VAC_L01_P000" (solid, pour order 0): 174.375,269.375 186.875,269.375 191.875,264.25 191.875,255.575 191.1,254.8 174.2,254.8 173.125,255.875 173.125,268.125
GND on Bottom Layer "NONET_L-01_P-001" (solid, pour order 1): 163.8,255.7 163.8,265 172.8,265 172.8,255.8 174.1,254.5 202.8,254.5 202.8,220.6 167.7,185.5 150.4,185.5 150.4,255.7
GND on Bottom Layer "NONET_L-01_P-001" (solid, pour order 2): 174.4,269.4 173.1,268.1 173.1,255.9 174.1,254.9 174.2,254.8 202.8,254.8 202.8,269.4
GND on Bottom Layer "NONET_L-01_P-001" (solid, pour order 3): 199.358,254.1 199.961,254.703 199.961,255.7 192,255.834 192,253.92

## Keep-outs
Keep-Out Layer:
  the board outline again, w0.1

## Silkscreen, mask and mechanical layers (free items; w line width, h text height)
Top Overlay:
  drawing of 51 lines, arcs and shapes, not listed
Bottom Overlay:
  text "Elia S, Harry M" at 198.446,228.962 h1.52
  text "Rachel P, Soriana H" at 198.446,226.562 h1.52
  text "EE209 Energy Monitor" at 189.946,223.862 h1.52
  text "Team 8" at 189.946,221.354 h1.52
  text "2025" at 189.946,218.754 h1.52
Mechanical 1:
  lines w0.1: 150,184.4 168.2,184.4 169.2,185.4 204,220.2 204,270.2 151.4,270.2 150,270.2 150,184.4

## Text inside footprints (layer, text, board x,y; h text height)
"ISP Header": Top Overlay "1" at 196.674,222.984 h1.27 r225; Top Overlay "5" at 190.567,216.878 h1.27 r225; Top Overlay "6" at 192.363,215.082 h1.27 r225